# Altium PCB 2014-09-02_06-18-00.PcbDoc
Units mil, origin at the board's own origin, x right, y up, seen from the top; angles counter-clockwise.
Board outline 2206 x 2006 mil, 4 copper layers (Top Layer, MidLayer1, MidLayer2, Bottom Layer); 12 components, 6 nets, 35 pads, 34 vias.
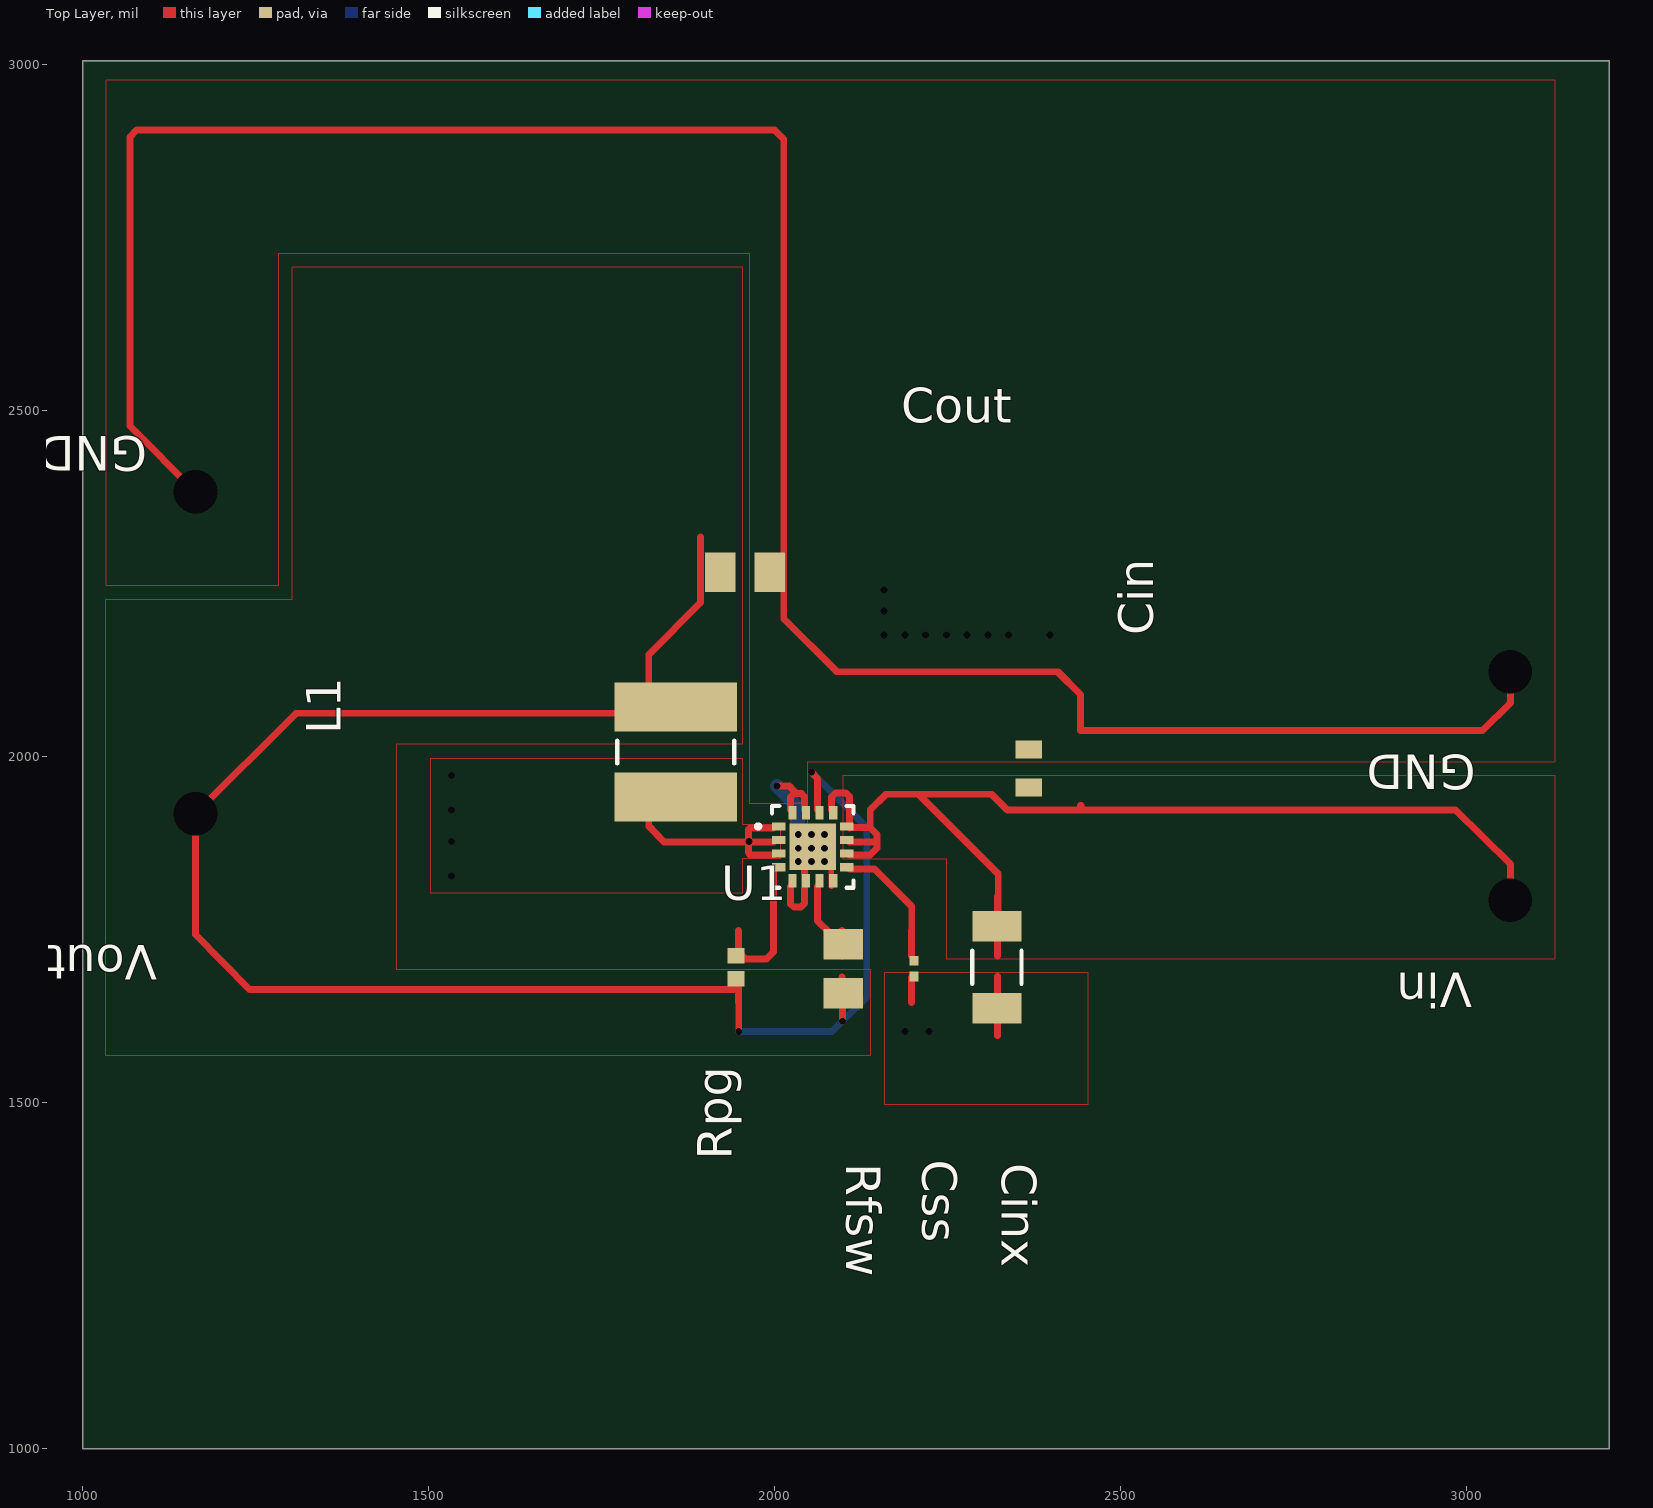
[diagram p0: Top Layer view]
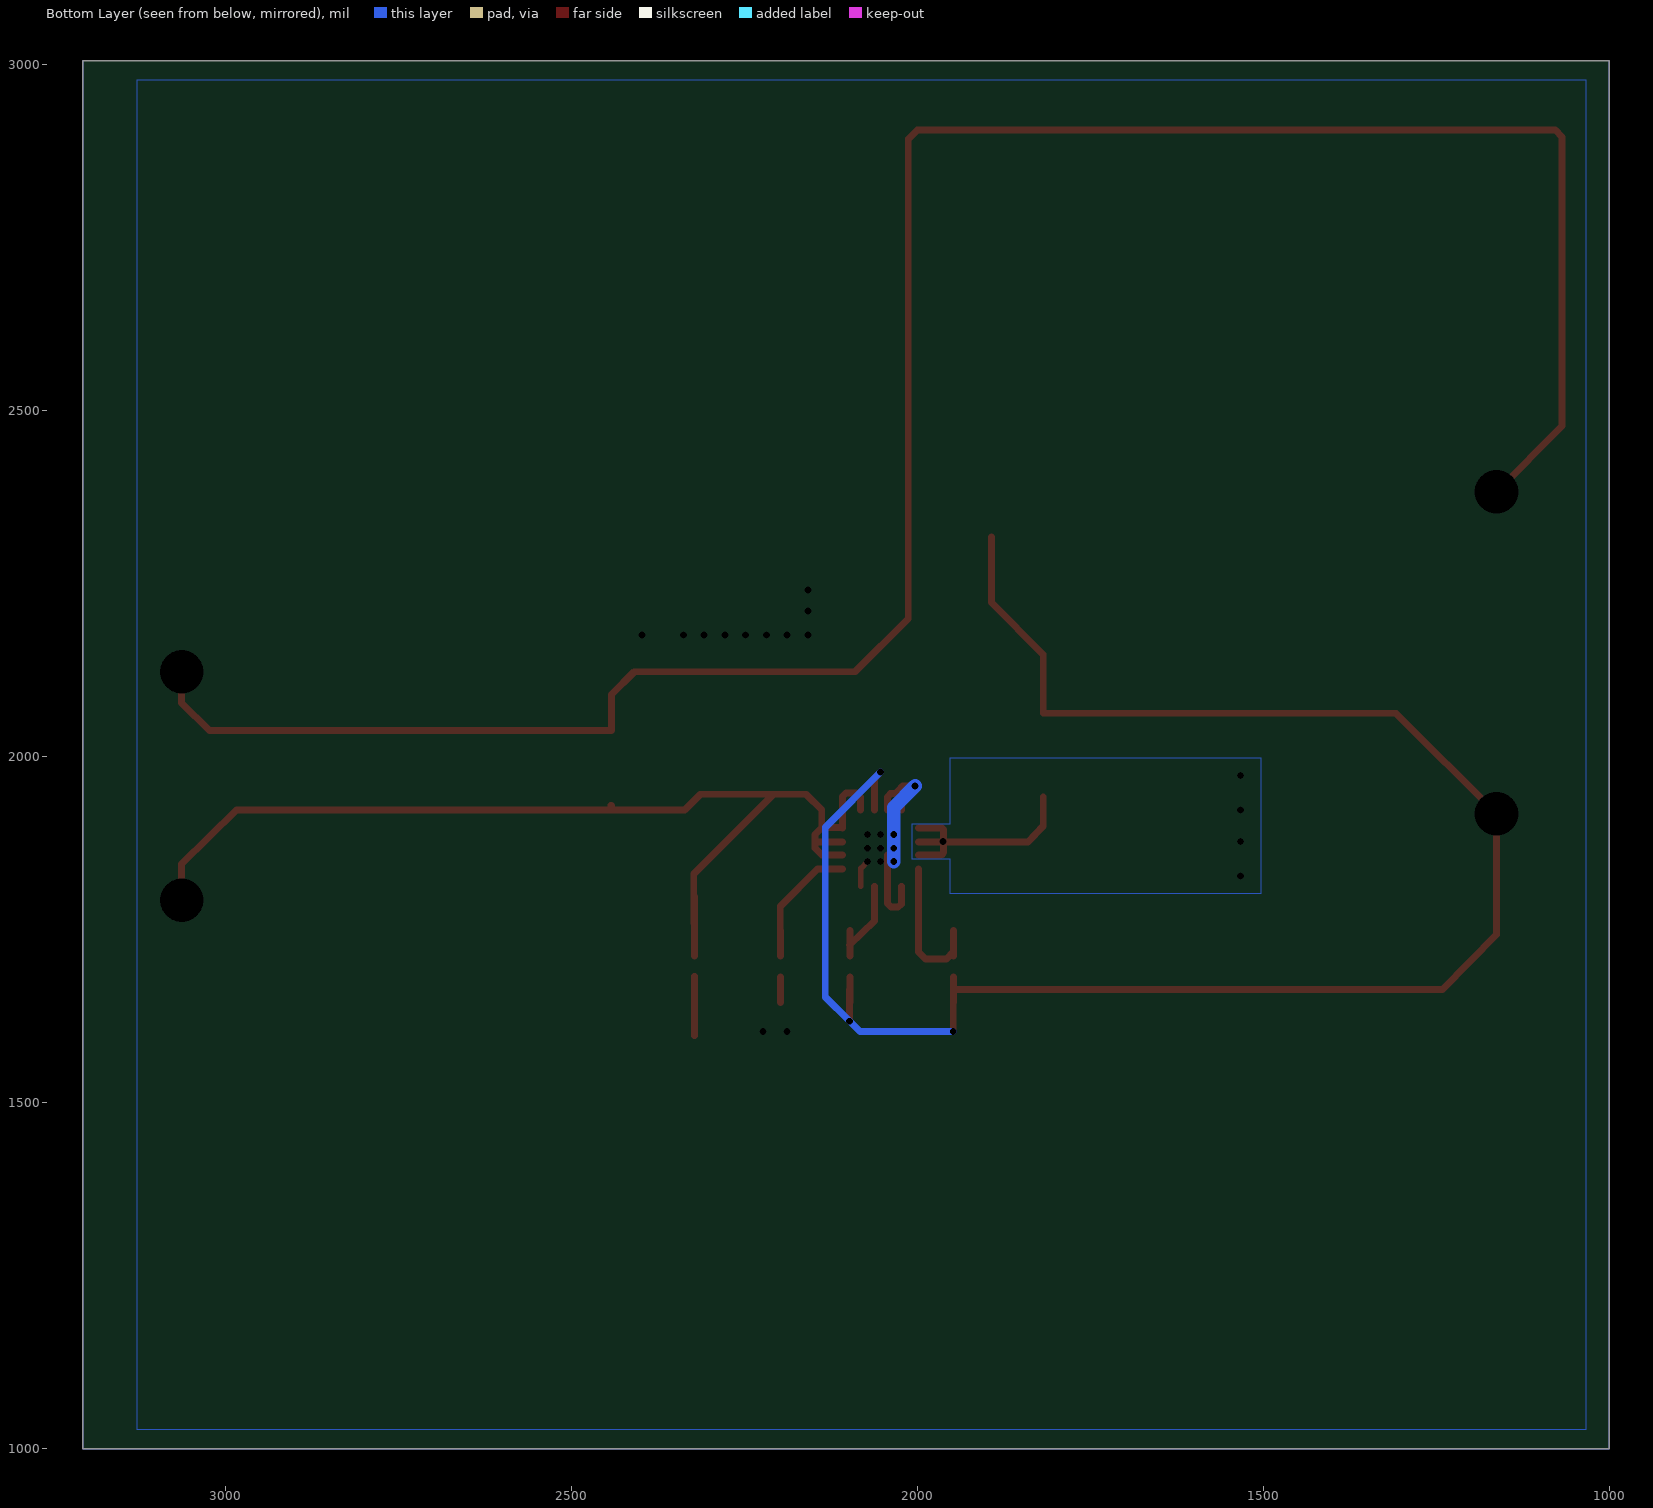
[diagram p1: Bottom Layer view, seen from below]

## Layer stack, top to bottom
Top Layer: signal copper 1.4
Dielectric: core 12.6, FR-4, Dk 4.8
MidLayer1: signal copper 1.4
Dielectric: prepreg 12.6, FR-4, Dk 4.8
MidLayer2: signal copper 1.4
Dielectric: core 12.6, FR-4, Dk 4.8
Bottom Layer: signal copper 1.4

## Board outline
1000,1000 3206,1000 3206,3006 1000,3006

## Design rules (kind name [scope] priority, off if disabled: settings)
PlaneConnect [All] p0: scope1count=1 scope1_0_kind=Board scope1_0_value=Board scope2count=1 scope2_0_kind=Board scope2_0_value=Board commentlength=0 planeconnectstyle=Direct reliefexpansion=20 reliefentries=4 reliefconductorwidth=10 reliefairgap=10
PlaneConnect [All] p1: planeconnectstyle=Direct reliefexpansion=20 reliefentries=4 reliefconductorwidth=10 reliefairgap=10
PolygonConnect [All] p0: scope1count=1 scope1_0_kind=Board scope1_0_value=Board scope2count=1 scope2_0_kind=Board scope2_0_value=Board commentlength=0 connectstyle=Direct reliefconductorwidth=10 reliefentries=4 polygonreliefangle="90 Angle"
PolygonConnect [All] p1: connectstyle=Direct reliefconductorwidth=10 reliefentries=4 polygonreliefangle="90 Angle"

## Components (designator, comment, footprint, x,y, rotation, side; value= is the part's Value field where it differs from the comment)
Cin "" 0603 2367,1983 r90 top
Cinx "" 1206 2321,1696 r270 top
Cout "" 0805 1957,2267 r0 top
Css "" 0201 2201,1694 r270 top
GND "" TP-1502 1156,2379 r180 top
GND1 "" TP-1502 3060,2115 r180 top
L1 "" SDR0403 1857,2007 r90 top
Rfsw "" 0805 2099,1694 r270 top
Rpg "" 0402 1944,1696 r90 top
U1 "" S-PVQFN-N16 2055,1870 r0 top
Vin "" TP-1502 3061,1786 r180 top
Vout "" TP-1502 1161,1913 r180 top

## Footprints (in the part's own frame and the unit in brackets; to place one, negate y for a bottom-side part, rotate by r counter-clockwise, add the part's x,y. Pads: shape width x height; smd on the part's side, far side on the other; paste and mask are expansions set on the pad)
0201 [mil]
  rect 14x13 smd: 1(-11.5,0) 2(11.5,0)
0402 [mil]
  rect 22x24 smd: 1(-16.5,0) 2(16.5,0)
0603 [mil]
  rect 26x38 smd: 1(-27.5,0) 2(27.5,0)
0805 [mil]
  rect 44x57 smd: 1(-35.5,0) 2(35.5,0)
1206 [mil]
  rect 44x71 smd: 1(-59,0) 2(59,0)
  silkscreen extent -24,-36 24,36
S-PVQFN-N16 [mm]
  rect 0.5x0.3 smd: 1(-1.25,0.75) 2(-1.25,0.25) 3(-1.25,-0.25) 4(-1.25,-0.75) 9(1.25,-0.75) 10(1.25,-0.25) 11(1.25,0.25) 12(1.25,0.75)
  rect 0.3x0.5 smd: 5(-0.75,-1.25) 6(-0.25,-1.25) 7(0.25,-1.25) 8(0.75,-1.25) 13(0.75,1.25) 14(0.25,1.25) 15(-0.25,1.25) 16(-0.75,1.25)
  rect 1.7x1.7 smd: 17(0,0)
  silkscreen extent -2.08,-1.5 1.5,1.5
SDR0403 [mil]
  rect 71x177 smd: 1(-65,0) 2(65,0)
  silkscreen extent -16,-84 16,84
TP-1502 [mil]
  round 0 hole 32: 1(0,0)

## Via types
v1: diameter 0, hole 10, Top Layer to Bottom Layer, 30 vias
v2: diameter 0, hole 63, Top Layer to Bottom Layer, 4 vias

## Nets (pads, with @x,y where several pads share a name; then routed paths per layer and width w, separated by ;. In a path a pad name is that pad's centre, name@x,y a point inside that pad or via, vN(x,y) a via of type N, cw(c..) or ccw(c..) an arc to the next point about the centre after c; other vN are vias at no path point)
0: Cin.2 Cinx.2 Cout.2 Css.2 GND1.1 GND.1 U1.5 U1.6 U1.8 U1.15 U1.16 U1.17 | length 3907.2
  Top Layer w8: v1(2072,1849) U1.17@2081,1839 ; U1.8@2082,1813 U1.17@2082,1839
  Top Layer w10: v2(1163,2383) 1068,2478 1068,2896 1078,2906 2000,2906 2013,2893 2013,2318 2013,2200 2090,2123 2409,2123 2442,2090 2442,2038 3023,2038 3063,2078 v2(3063,2123) ; v1(2003,1958) 2021,1958 2028,1951 2028,1947 ; U1.5@2023,1813 2023,1787 2028,1783 2038,1783 2043,1788 2043,1812 2043,1813 U1.17@2043,1858 ; U1.16@2023,1923 2023,1942 2028,1947 ; U1.15@2043,1923 2043,1942 2039,1947 2028,1947 ; 2197.5,1645 Css.2@2197.5,1682 ; 2322,1597 2322,1683
  Bottom Layer w20: v1(2003,1958) 2034,1927 2034,1887 v1(2034,1849)
  other v1: 2188,1603 2223,1603 2053,1849 2034,1868 2053,1868 2072,1868 2034,1888 2053,1888 2072,1888 2158,2176 2188,2176 2218,2176 2248,2176 2278,2176 2308,2176 2338,2176 2398,2176 2158,2211 2158,2241
1: Css.1 U1.9 | length 202.4
  Top Layer w10: U1.9@2108,1838 2144,1838 2198,1784 2198,1731 ; Css.1@2197.5,1712 2197.5,1749
2: Cout.1 L1.2 Rfsw.1 Rfsw.2 Rpg.1 U1.7 U1.14 Vout.1 | length 2934.7
  Top Layer w10: 1893,2318 1893,2223 1818,2148 1818,2063 1308,2063 v2(1163,1918) 1163,1743 1241,1664 1948,1664 v1(1948,1603) ; 1947.5,1645 Rpg.1@1947.5,1682 ; v1(2053,1978) 2062,1968 U1.14@2062,1923 ; U1.7@2062,1813 2062,1788 2062,1763 Rfsw.1@2098,1728 ; Rfsw.2@2097.5,1645 2097.5,1682 ; Rfsw.1@2097.5,1712 Rfsw.1@2097.5,1749 ; v1(2098,1618) Rfsw.2@2098,1664
  Bottom Layer w10: v1(1948,1603) 2083,1603 v1(2098,1618) 2133,1653 2133,1898 v1(2053,1978)
3: Cin.1 Cinx.1 U1.10 U1.11 U1.12 U1.13 Vin.1 | length 1618.5
  Top Layer w10: U1.13@2082,1923 2082,1942 2088,1948 2103,1948 2108,1943 2108,1897 2108,1898 2138,1898 ; U1.10@2108,1858 2138,1858 2148,1868 2148,1877 ; U1.11@2108,1877 2148,1877 ; 2322,1712 2322,1798 ; Cinx.1@2323,1760 2323,1831 2208,1946 ; 2442,1930 2443,1930 ; v2(3063,1793) 3063,1845 2984,1923 2442,1923 2336,1923 2313,1946 2208,1946 ; 2138,1898 2148,1888 2148,1877 ; 2138,1898 2138,1923 2161,1946 2208,1946
5: L1.1 U1.1 U1.2 U1.3 | length 339.7
  Top Layer w10: L1.1@1818,1942 1818,1900 1840,1877 1962,1877 ; U1.3@1998,1858 1965,1858 1962,1862 1962,1877 ; U1.2@1998,1877 1962,1877 ; U1.1@1998,1897 1964,1897 1962,1895 1962,1877
  other v1: 1533,1828 1533,1878 1963,1878 1533,1923 1533,1973
11: Rpg.2 U1.4 | length 228.3
  Top Layer w10: Rpg.2@1947.5,1712 1947.5,1749 ; 1948,1731 1948,1718 1958,1708 1988,1708 1998,1718 U1.4@1998,1838

## Polygon pours and split planes (outlines as drawn)
5 on Top Layer " " (solid, pour order 0): 2008,1853 1953,1853 1953,1803 1503,1803 1503,1998 1953,1998 1953,1903 2008,1903
3 on Top Layer " " (solid, pour order 1): 2098,1853 2248,1853 2248,1708 3128,1708 3128,1973 2098,1973
2 on Top Layer " " (solid, pour order 2): 1033,2228 1303,2228 1303,2708 1953,2708 1953,2018 1453,2018 1453,1693 2138,1693 2138,1568 1033,1568
0 on Top Layer " " (solid, pour order 6): 2048,1993 3128,1993 3128,2978 1033,2978 1033,2248 1283,2248 1283,2728 1963,2728 1963,1933 2048,1933
0 on Top Layer " " (solid, pour order 7): 2048,1838 2083,1838 2083,1898 2048,1898 2048,1933 2023,1933 2023,1838 2038,1838 2048,1813
0 on Top Layer " " (solid, pour order 8): 2453,1688 2158,1688 2158,1498 2453,1498
5 on Bottom Layer " " (solid, pour order 3): 2008,1853 1953,1853 1953,1803 1503,1803 1503,1998 1953,1998 1953,1903 2008,1903
0 on Bottom Layer " " (solid, pour order 9): 1033,2978 3128,2978 3128,1028 1033,1028
5 on MidLayer1 " " (solid, pour order 4): 2008,1853 1953,1853 1953,1803 1503,1803 1503,1998 1953,1998 1953,1903 2008,1903
5 on MidLayer2 " " (solid, pour order 5): 2008,1853 1953,1853 1953,1803 1503,1803 1503,1998 1953,1998 1953,1903 2008,1903
0 on MidLayer1 " " (solid, pour order 10): 1033,2978 3128,2978 3128,1028 1033,1028
0 on MidLayer2 " " (solid, pour order 11): 1033,2978 3128,2978 3128,1028 1033,1028

## Other copper
Multi-Layer:
  the board outline again, w1